# EAGLE board jkff v5 (EAGLE 9.7.0)
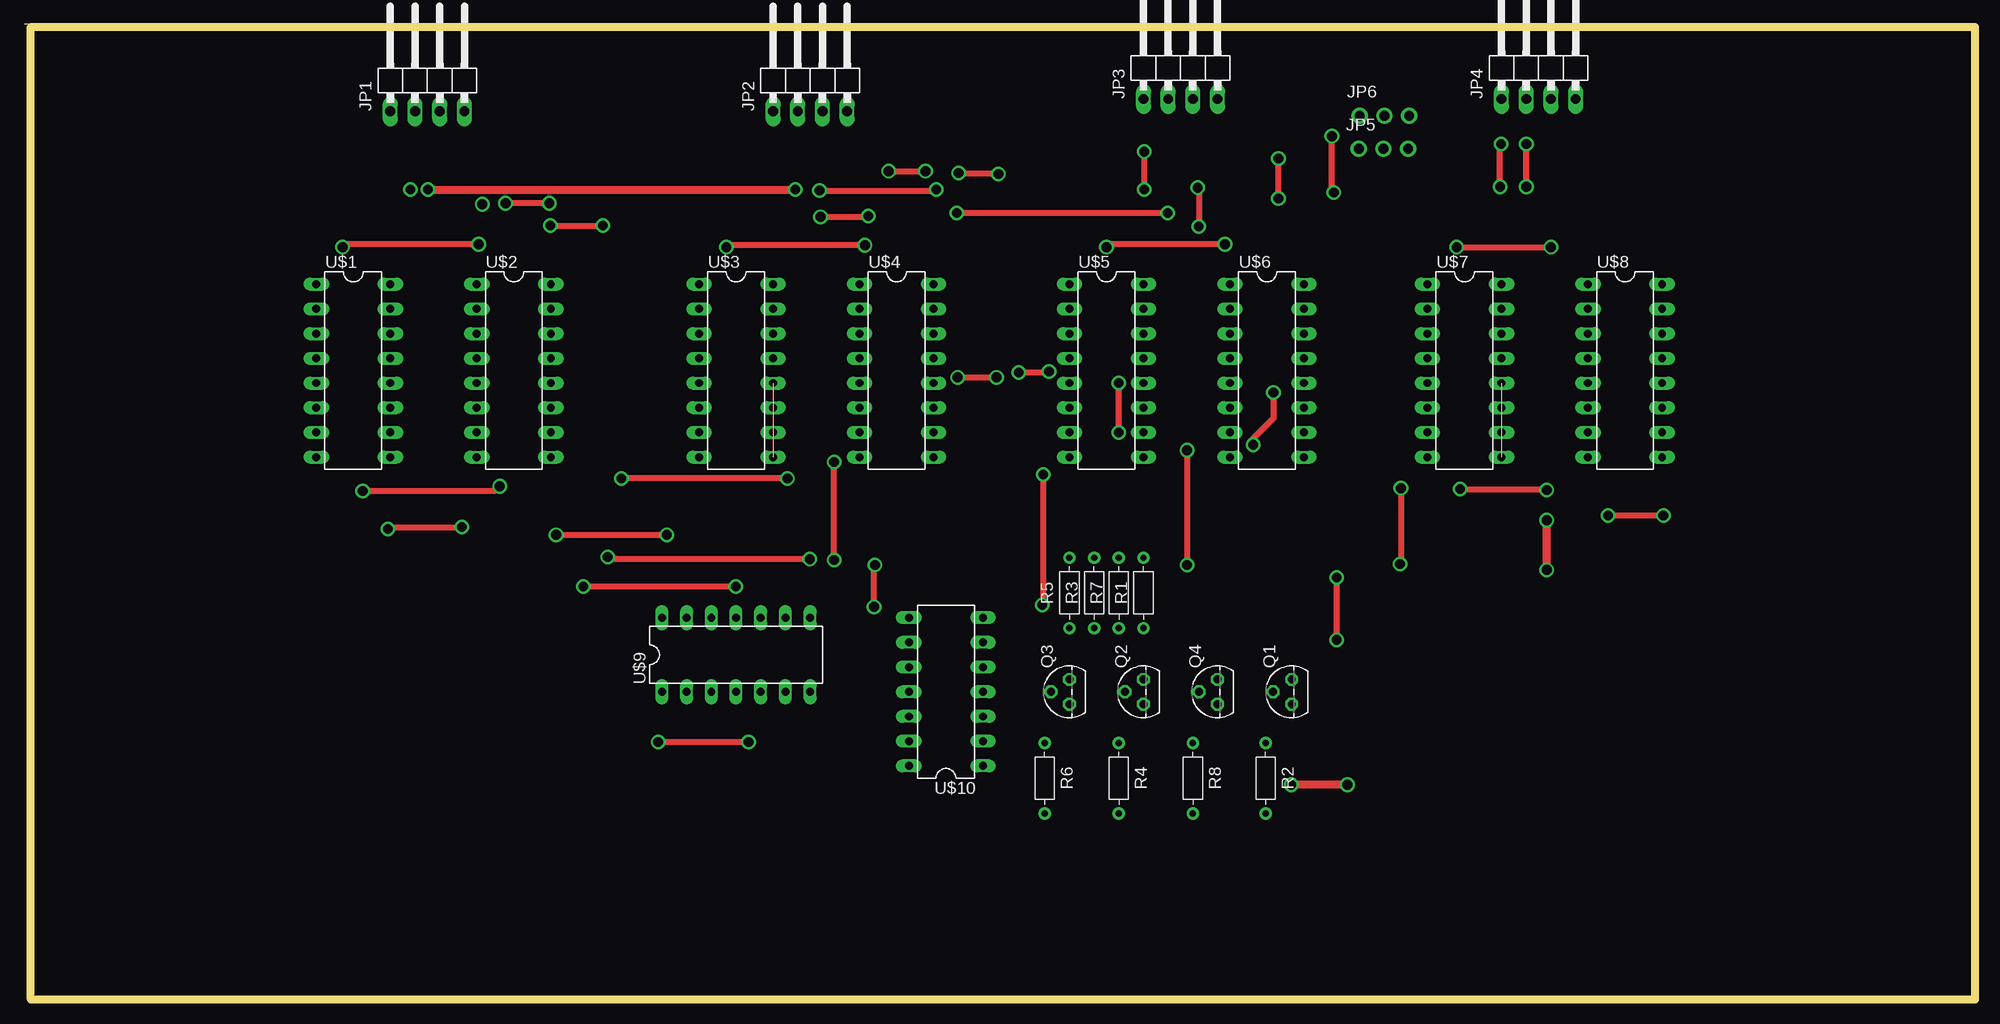
[diagram p0: board, top side]
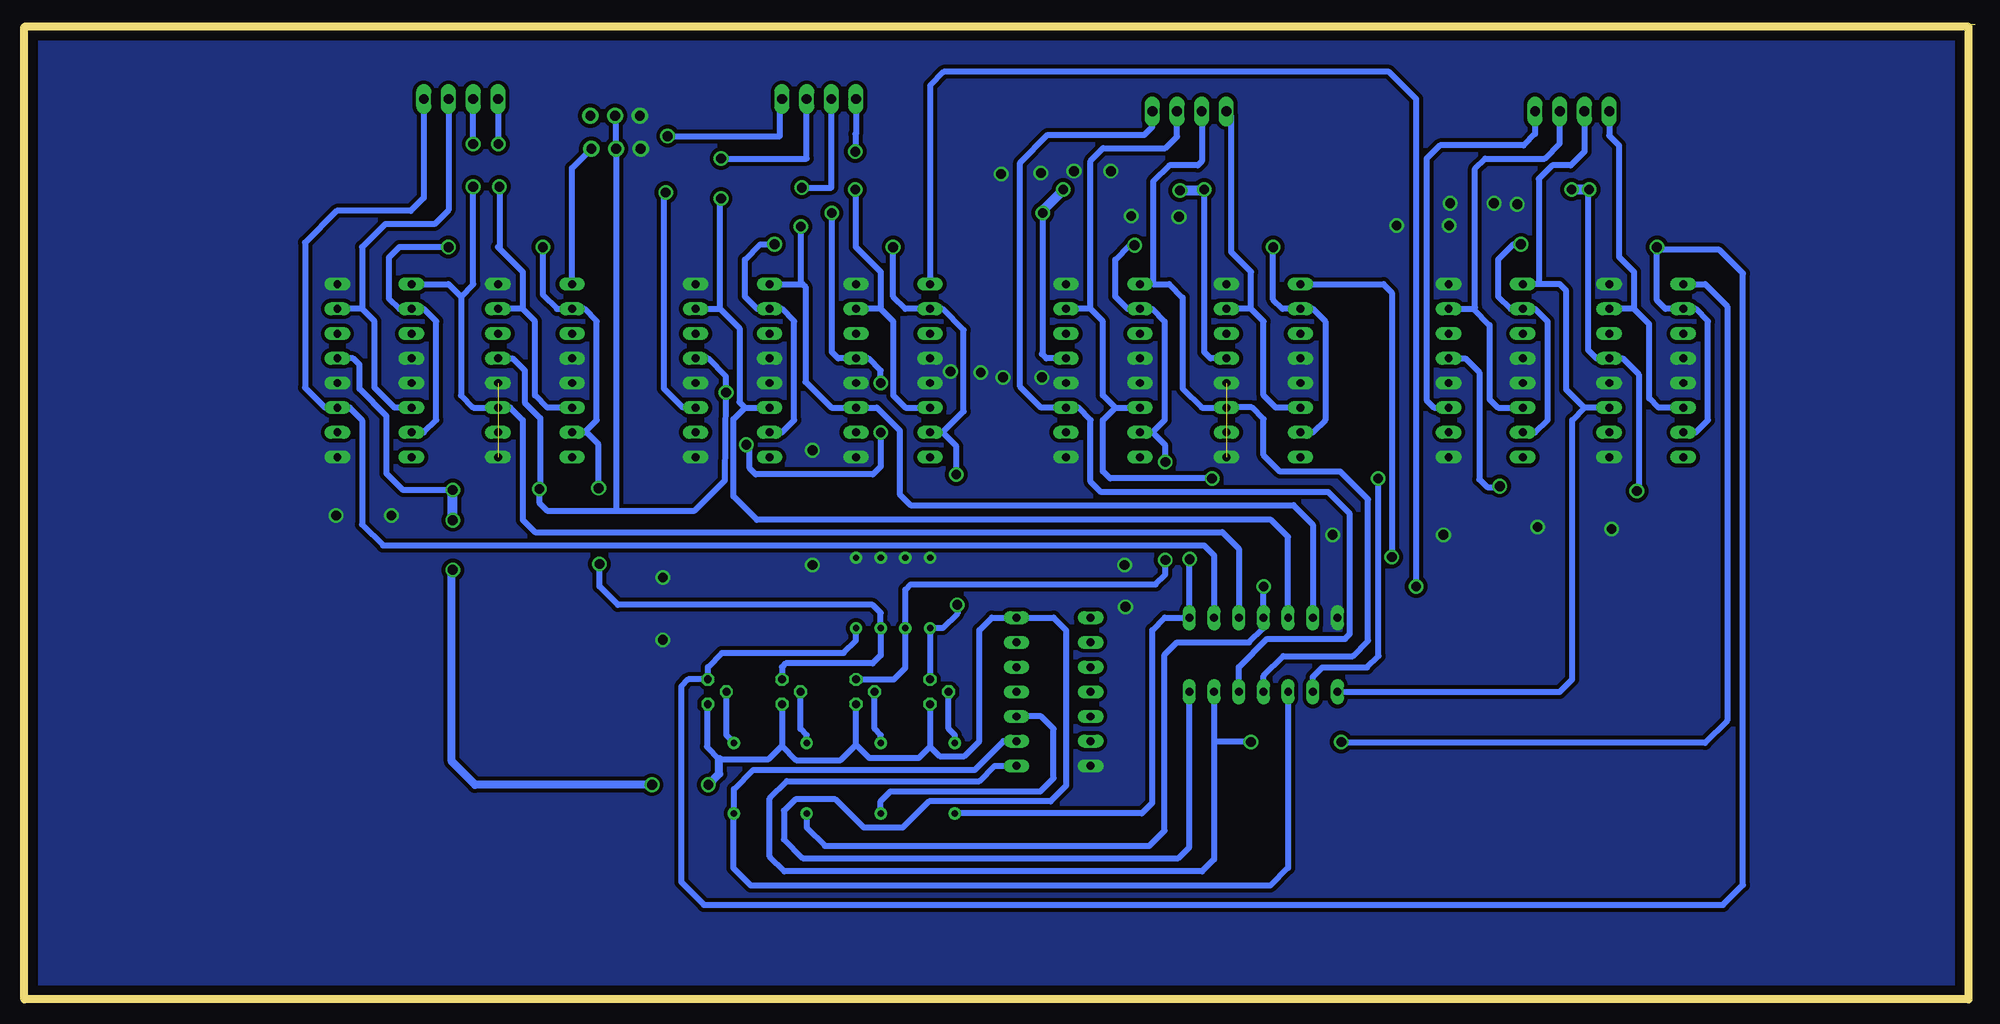
[diagram p1: board, bottom side, seen from below]

Size 200.67 x 100.27 mm. Coordinates in mm from the lower left corner, seen from the top.
Outline: 160,100.27 0,100.27
Outline: 0.67,100 200.67,100 200.67,0 0.67,0 0.67,100
Copper layers (1*16): Top 0.035mm / dielectric 1.5mm / Bottom 0.035mm
Design rules "default": minimum track width 6mil, minimum drill 0.35mm, track to track 6mil, track to pad 6mil, pad to pad 6mil, via to via 6mil, smd to smd 6mil, copper to edge 40mil, drill to drill 6mil, minimum pad ring 10mil, minimum via ring 8mil, stop-mask expansion 4mil, vias tented up to drill 0mil, thermal gap 10mil

## Footprints (pad centres in the part's own frame; a part is rotated, then mirrored left to right if it is on the bottom)
1X04/90 = drill 1.016 long: 1 -3.81,-3.81; 2 -1.27,-3.81; 3 1.27,-3.81; 4 3.81,-3.81
1X03-CLEANBIG = drill 1.016 pad 1.676: 1 -2.54,0; 2 0,0; 3 2.54,0
TO92 = drill 0.813 octagon: 1 -1.27,0; 2 0,1.905; 3 1.27,0
RESAD724W46L381D178B = drill 0.66 pad 1.26: 1 -3.62,0; 2 3.62,0
DIO16 = drill 0.813 long: 1 -15.24,-3.81; 2 -12.7,-3.81; 3 -10.16,-3.81; 4 -7.62,-3.81; 5 -5.08,-3.81; 6 -2.54,-3.81; 7 0,-3.81; 8 2.54,-3.81; 9 2.54,3.81; 10 0,3.81; 11 -2.54,3.81; 12 -5.08,3.81; 13 -7.62,3.81; 14 -10.16,3.81; 15 -12.7,3.81; 16 -15.24,3.81
DIO14 = drill 0.813 long: 1 -12.7,-3.81; 2 -10.16,-3.81; 3 -7.62,-3.81; 4 -5.08,-3.81; 5 -2.54,-3.81; 6 0,-3.81; 7 2.54,-3.81; 8 2.54,3.81; 9 0,3.81; 10 -2.54,3.81; 11 -5.08,3.81; 12 -7.62,3.81; 13 -10.16,3.81; 14 -12.7,3.81

## Placement (x,y rotation side)
JP1  PINHD-1X4/90  [1X04/90]  41.46,95.13 0 top
JP2  PINHD-1X4/90  [1X04/90]  80.83,95.13 0 top
JP3  PINHD-1X4/90  [1X04/90]  118.93,96.4 0 top
JP4  PINHD-1X4/90  [1X04/90]  155.76,96.4 0 top
JP5  [1X03-CLEANBIG]  139.8,87.47 0 top
JP6  [1X03-CLEANBIG]  139.9,90.87 0 top
Q1  NPN  [TO92]  130.36,31.63 90 top
Q2  NPN  [TO92]  115.12,31.63 90 top
Q3  NPN  [TO92]  107.5,31.63 90 top
Q4  NPN  [TO92]  122.74,31.63 90 top
R1  [RESAD724W46L381D178B]  115.12,41.79 90 top
R2  [RESAD724W46L381D178B]  127.68,22.74 270 top
R3  [RESAD724W46L381D178B]  110.04,41.79 90 top
R4  [RESAD724W46L381D178B]  112.58,22.74 270 top
R5  [RESAD724W46L381D178B]  107.5,41.79 90 top
R6  [RESAD724W46L381D178B]  104.96,22.74 270 top
R7  [RESAD724W46L381D178B]  112.58,41.79 90 top
R8  [RESAD724W46L381D178B]  120.2,22.74 270 top
U$1  74LS76  [DIO16]  33.84,58.3 270 top
U$2  74LS76  [DIO16]  50.35,58.3 270 top
U$3  74LS76  [DIO16]  73.21,58.3 270 top
U$4  74LS76  [DIO16]  89.72,58.3 270 top
U$5  74LS76  [DIO16]  111.31,58.3 270 top
U$6  74LS76  [DIO16]  127.82,58.3 270 top
U$7  74LS76  [DIO16]  148.14,58.3 270 top
U$8  74LS76  [DIO16]  164.65,58.3 270 top
U$9  74LS08  [DIO14]  78.29,35.44 0 top
U$10  74LS32  [DIO14]  94.8,36.71 90 top

## Library data of the parts
JP1-JP4 = Connector; CATEGORY: CONNECTOR; SUB-CATEGORY: PIN-HEADER
JP5 JP6 = adafruit
Q1-Q4 = Transistor; CATEGORY: Transistor; SUB-CATEGORY: BJT; TYPE: NPN
R1-R8 = Tutorial - Fusion 360; CATEGORY: Resistor; SUB-CATEGORY: Fixed
U$1-U$10 = Library

## Nets
A1: JP1.1 U$1.6 U$1.15
A2: JP2.1 U$3.6 U$3.15
A3: JP3.1 U$5.6 U$5.15
A4: JP4.1 U$7.6 U$7.15
B1: JP1.2 U$1.11 U$2.1 U$9.1
B2: JP2.2 U$3.11 U$4.1 U$9.4
B3: JP3.2 U$5.11 U$6.1 U$9.13
B4: JP4.2 U$7.11 U$8.1 U$9.10
C1: JP1.3 U$2.6 U$2.15
C2: JP2.3 U$4.6 U$4.15 U$9.2
C3: JP3.3 U$6.6 U$6.15 U$9.12
C4: JP4.3 U$8.6 U$8.15
D1: JP1.4 U$2.11
D2: JP2.4 U$4.11 U$9.5
D3: JP3.4 U$6.11
D4: JP4.4 U$8.11 U$9.9
GND: JP5.2 JP6.2 Q1.1 Q2.1 Q3.1 Q4.1 U$1.13 U$2.13 U$3.13 U$4.13 U$5.13 U$6.13 U$7.13 U$8.13 U$9.7 U$10.7
IN: JP5.3 U$7.1
N$1: Q2.2 R4.1
N$7: Q3.2 R6.1
N$8: Q4.2 R8.1
N$16: Q1.2 R2.1
OUT1: R2.2 U$9.3 U$10.2
OUT2: U$1.1 U$9.6 U$10.1
OUT3: R6.2 U$3.1 U$9.8
OUT4: R8.2 U$5.1 U$9.11
OUT32: R4.2 U$10.3
OUT_TO_DIS: JP6.3
RES1: Q1.3 R1.1 U$1.2 U$1.7 U$2.2 U$2.7
RES2: Q2.3 R3.1 U$3.2 U$3.7 U$4.2 U$4.7
RES3: Q3.3 R5.1 U$5.2 U$5.7 U$6.2 U$6.7
RES4: Q4.3 R7.1 U$7.2 U$7.7 U$8.2 U$8.7
VCC: JP5.1 JP6.1 R1.2 R3.2 R5.2 R7.2 U$1.4 U$1.5 U$1.9 U$1.12 U$1.16 U$2.4 U$2.5 U$2.9 U$2.12 U$2.16 U$3.4 U$3.5 U$3.9 U$3.12 U$3.16 U$4.4 U$4.5 U$4.9 U$4.12 U$4.16 U$5.4 U$5.5 U$5.9 U$5.12 U$5.16 U$6.4 U$6.5 U$6.9 U$6.12 U$6.16 U$7.4 U$7.5 U$7.9 U$7.12 U$7.16 U$8.4 U$8.5 U$8.9 U$8.12 U$8.16 U$9.14 U$10.14

## Tracks (layer width: path | path; a pad name or v marks a point on that pad's centre or on a via)
A1
  Bottom 0.61: U$1.6 32.57,60.84 33.54,61.81 33.54,69.43 35.11,71 | 35.11,71 U$1.15 | JP1.1 37.65,88.82 36.65,87.82 36.65,76.35 35.11,74.81 35.11,71
A2
  Bottom 0.61: U$3.6 71.94,60.84 73.21,62.11 73.21,69.73 74.48,71 | 74.48,71 U$3.15 | JP2.1 76.52,90.82 76.52,76.85 74.48,74.81 74.48,71
A3  (via drill 1)
  Top 0.61: v115.2,83.27 v115.2,87.17
  Bottom 0.61: 112.58,71 U$5.15 | 112.58,71 111.31,69.73 111.31,62.11 110.04,60.84 U$5.6 | 112.58,71 112.58,74.81 115.12,77.35 115.12,83.27 v115.2,83.27 | JP3.1 115.12,88.97 | 115.12,88.97 115.2,88.97 | v115.2,87.17 115.12,87.17 115.12,88.97
A4  (via drill 1)
  Top 0.61: v151.8,83.57 151.8,87.97 v151.9,87.97
  Bottom 0.61: U$7.6 146.87,60.84 148.14,62.11 148.14,69.73 149.41,71 | 149.41,71 U$7.15 | 149.41,71 149.41,74.81 151.95,77.35 151.8,77.35 v151.8,83.57 | v151.9,87.97 151.9,92.59 JP4.1
B1
  Bottom 0.61: U$1.11 40.19,60.84 | 40.19,60.84 42.06,62.71 42.06,72.87 42.73,73.54 44.89,73.54 | 44.89,73.54 U$2.1 | 44.89,73.54 44.89,84.38 43.5,85.77 41.6,85.77 40.2,87.17 40.2,88.37 40.19,88.38 JP1.2 | U$9.1 42.73,31.63 41.46,32.9 41.46,59.57 40.19,60.84
B2
  Bottom 0.61: 84.56,73.54 82.9,73.54 81.53,72.17 81.53,62.81 79.56,60.84 U$3.11 76.99,60.87 74.4,60.87 73.2,59.67 73.2,55.97 71.5,54.27 65.3,54.27 62.45,51.42 62.45,36.88 64.02,35.31 71.17,35.31 73.21,33.27 U$9.4 | 84.56,73.54 U$4.1 | JP2.2 79.56,86.18 79.97,85.77 82.9,85.77 84.56,84.11 84.56,73.54
B3  (via drill 1)
  Top 0.61: v120.7,83.47 120.8,83.37 v120.8,79.47
  Bottom 0.61: U$6.1 120.8,73.54 | 120.8,73.54 120.6,73.54 120.33,73.27 120.33,63.51 117.66,60.84 U$5.11 112.98,60.84 110.64,58.5 110.64,51.95 109.52,50.83 70.13,50.83 68.13,48.83 U$9.13 | JP3.2 117.66,83.47 v120.7,83.47 | v120.8,79.47 120.8,73.54
B4  (via drill 1)
  Top 0.61: v154.5,83.57 v154.5,87.97
  Bottom 0.61: U$8.1 157.03,73.54 155.76,72.27 | 155.76,72.27 155.76,62.11 154.49,60.84 U$7.11 150.68,60.84 149.41,59.57 149.41,49.32 148.13,48.04 77.43,48.04 75.75,46.36 U$9.10 | 155.76,72.27 154.49,73.54 v154.49,83.57 v154.5,83.57 | v154.5,87.97 JP4.2
C1
  Bottom 0.61: U$2.15 51.62,71 | 51.62,71 49.95,69.33 49.95,61.71 49.08,60.84 U$2.6 | JP1.3 42.73,88.02 44.28,86.47 50.4,86.47 51.45,85.42 51.45,71.17 51.62,71
C2  (via drill 1)
  Top 0.61: v78.5,53.57 v61.4,53.57
  Bottom 0.61: 88.45,60.84 U$4.6 | 88.45,60.84 89.72,62.11 89.72,69.73 90.99,71 | 90.99,71 U$4.15 | 90.99,71 90.99,86.23 89.69,87.53 83.29,87.53 82.1,88.72 JP2.3 | U$9.2 68.13,33.17 67.16,34.14 62.55,34.14 61.38,35.31 61.38,53.55 v61.4,53.57 | 88.45,60.84 89.72,59.57 89.72,54.3 88.99,53.57 v78.5,53.57
C3  (via drill 1)
  Top 0.61: v129,82.37 v129,86.47
  Bottom 0.61: U$6.15 129.09,71 | 129.09,71 127.12,69.03 127.12,61.41 126.55,60.84 | 126.55,60.84 U$6.6 | U$9.12 70.67,47.56 72.42,49.31 125.32,49.31 127.73,51.72 127.73,59.66 126.55,60.84 | JP3.3 120.2,86.47 v129,86.47 | 129.09,71 129.09,82.28 v129,82.37
C4
  Bottom 0.61: U$8.6 162.58,60.84 164.65,62.91 164.65,69.73 165.92,71 | 165.92,71 U$8.15 | JP4.3 157.03,81.16 158.47,79.72 163.55,79.72 165.92,77.35 165.92,71
D1
  Bottom 0.61: JP1.4 45.27,89 46.44,87.83 55.06,87.83 56.44,86.45 56.44,61.62 55.66,60.84 U$2.11
D2
  Bottom 0.61: JP2.4 84.64,89.72 85.47,88.89 95.4,88.89 98.24,86.05 98.24,63.01 96.07,60.84 U$4.11 92.26,60.84 90.99,59.57 90.99,53.22 89.92,52.15 66.54,52.15 64.32,49.93 64.32,37.58 64.83,37.07 72.85,37.07 75.75,34.17 U$9.5
D3  (via drill 1)
  Top 0.61: v134.7,82.97 134.5,83.17 v134.5,88.77
  Bottom 0.61: JP3.4 122.94,92.39 122.94,88.77 v134.5,88.77 | U$6.11 132.9,60.84 134.87,62.81 134.87,82.8 v134.7,82.97
D4
  Bottom 0.61: JP4.4 159.57,82.43 160.91,81.09 168.53,81.09 171.8,77.82 171.8,62.91 169.73,60.84 U$8.11 167.19,60.84 165.92,59.57 165.92,48.82 163.78,46.68 79.31,46.68 78.29,45.66 U$9.9
GND  (via drill 1)
  Top 0.61: v112.58,58.3 v112.58,63.38 | v147.7,52.47 156.5,52.47 v156.6,52.37 | v48.9,52.77 48.4,52.27 v34.8,52.27 | v81.8,83.17 93.7,83.17 v93.8,83.27 | v128.49,62.41 128.49,59.77 126.39,57.67 v126.39,57.03 | v117.6,80.87 v117.59,80.86 v95.91,80.86 v95.9,80.87
  Top 0.813: v41.5,83.27 v79.3,83.27 | v156.6,44.17 v156.6,49.27 | v136.1,22.07 v130.3,22.07
  Bottom 0.61: U$6.13 130.36,65.92 128.49,64.05 v128.49,62.41 128.49,62.01 128.59,53.38 131.7,50.27 139.9,50.27 | Q3.1 107.5,25.98 | 107.5,25.98 108.67,24.81 113.75,24.81 115.12,26.18 | 115.12,26.18 Q2.1 | Q4.1 122.74,26.08 | 122.74,26.08 121.27,24.61 116.69,24.61 115.12,26.18 | Q1.1 130.46,30.26 130.46,25.98 129.19,24.71 124.11,24.71 122.74,26.08 | v112.58,63.38 112.58,64.65 113.85,65.92 U$5.13 116.95,65.92 117.6,66.57 v117.6,80.87 | v112.58,58.3 112.58,54.79 113.39,53.98 125.43,53.98 126.05,54.6 126.05,57.03 v126.39,57.03 | 107.5,25.98 106.53,25.01 103.96,25.01 102.42,26.55 102.42,37.98 101.15,39.25 U$10.7 94.8,39.25 93.5,37.95 93.5,21.97 95.1,20.37 107.6,20.37 110.31,17.66 114.32,17.66 117.24,20.58 121.36,20.58 122.54,19.4 122.54,16.46 120.6,14.52 81.97,14.52 80.83,15.66 U$9.7 | U$7.13 150.45,65.92 149.2,64.67 149.2,61.37 147.6,59.77 147.6,52.57 v147.7,52.47 147.7,51.07 146.9,50.27 139.9,50.27 | v156.6,52.37 161.7,52.37 163.4,54.07 163.4,59.97 166.2,62.77 166.2,65.27 166.85,65.92 U$8.13 | v39.7,83.27 39.8,83.27 39.8,66.77 38.95,65.92 U$1.13 36.25,65.92 34.6,64.27 34.6,52.47 v34.8,52.27 | U$2.13 52.45,65.92 51,64.47 51,53.47 50.2,52.67 49,52.67 v48.9,52.77 | U$3.13 78.65,65.92 79.3,66.57 v79.3,83.27 | U$4.13 95.55,65.92 95.95,66.32 | 96,66.37 95.95,66.32 | v95.9,80.87 95.95,80.82 95.95,66.32 | 139.9,50.27 139.8,50.37 JP5.2 139.8,90.77 JP6.2
  Bottom 0.813: v130.3,22.07 129.19,23.18 129.19,24.71 | v136.1,22.07 154.3,22.07 156.7,24.47 156.7,44.07 v156.6,44.17
  Bottom 1.016: v39.7,83.27 v41.5,83.27 | v79.3,83.27 79.4,83.17 v81.8,83.17 | v93.8,83.27 95.9,81.17 v95.9,80.87 | v156.6,49.27 v156.6,52.37
IN
  Bottom 0.61: U$7.1 144.33,85.48 JP5.3
N$1
  Bottom 0.61: R4.1 112.58,27.18 113.22,27.82 Q2.2
N$7
  Bottom 0.61: R6.1 104.96,27.18 105.59,27.82 Q3.2
N$8
  Bottom 0.61: R8.1 120.2,27.18 120.83,27.82 Q4.2
N$16
  Bottom 0.61: R2.1 127.68,26.41 128.46,27.18 Q1.2
OUT1
  Bottom 0.61: U$9.3 70.67,13.52 72.49,11.7 125.93,11.7 127.72,13.49 127.72,19.08 R2.2 127.68,21.61 125.69,23.6 102.9,23.6 99.95,26.55 U$10.2
OUT2  (via drill 1)
  Top 0.61: v65.2,26.47 v74.5,26.47
  Bottom 0.61: U$9.6 78.29,26.57 | 78.29,26.57 78.29,14.39 79.52,13.16 122.48,13.16 124.01,14.69 124.01,20.66 122.23,22.44 102.42,22.44 100.85,24.01 U$10.1 | U$1.1 27.77,73.54 25.5,71.27 25.5,28.67 27.8,26.37 65.1,26.37 v65.2,26.47 | v74.5,26.47 78.19,26.47 78.29,26.57
OUT3  (via drill 1)
  Top 0.61: v80.8,45.27 60.01,45.27 v60.01,45.48
  Bottom 0.61: R6.2 85.72,19.12 84.64,20.2 84.64,37.98 83.37,39.25 U$9.8 80.8,39.28 v80.8,45.27 | U$3.1 60.87,73.54 60.01,72.68 v60.01,45.48
OUT4  (via drill 1)
  Top 0.61: v57.5,42.47 v73.2,42.47
  Bottom 0.61: R8.2 120.2,17.66 118.33,15.79 84.94,15.79 83.37,17.36 83.37,35.44 82.1,36.71 74.68,36.71 73.21,38.18 U$9.11 v73.21,42.46 v73.2,42.47 | U$5.1 107.5,93.97 106.1,95.37 60.3,95.37 57.5,92.57 v57.5,42.47
OUT32
  Bottom 0.61: U$10.3 96.07,29.09 94.8,27.82 94.8,22.74 96.16,21.38 111.59,21.38 112.58,20.39 R4.2
RES1  (via drill 1)
  Top 0.61: v46.73,77.65 33.04,77.65 v32.74,77.35
  Bottom 0.61: U$2.7 45.27,58.3 44,59.57 44,69.73 45.27,71 U$2.2 47.81,71 49.08,72.27 49.08,76.08 47.51,77.65 v46.73,77.65 | U$1.7 28.76,58.3 27.49,59.57 27.49,69.73 28.76,71 U$1.2 31.87,71 32.74,71.87 32.74,77.07 | R1.1 115.12,36.9 116.39,35.63 128.9,35.63 130.36,34.17 Q1.3 132.37,32.9 133.1,32.17 133.1,12.07 130.76,9.73 25.94,9.73 23.9,11.77 23.9,74.67 26.3,77.07 32.74,77.07 | 32.74,77.07 v32.74,77.35
RES2  (via drill 1)
  Top 0.61: v72.21,77.35 72.41,77.55 v86.47,77.55 | v83.3,45.17 v83.3,55.27
  Bottom 0.61: 84.64,58.3 83.37,59.57 83.37,69.73 84.64,71 U$4.2 87.18,71 88.45,72.27 88.45,76.08 86.98,77.55 v86.47,77.55 | 84.64,58.3 U$4.7 | U$3.7 68.13,58.3 66.86,59.57 66.86,69.73 68.13,71 U$3.2 71.24,71 72.21,71.97 v72.21,77.35 | Q2.3 111.23,32.9 110.04,34.09 R3.1 110.04,42.13 109.5,42.67 84.3,42.67 83.3,43.67 v83.3,45.17 | v83.3,55.27 83.3,56.97 84.64,58.3
RES3  (via drill 1)
  Top 0.61: v123.5,77.65 111.61,77.65 v111.31,77.35 | v104.8,53.97 104.8,40.67 v104.7,40.57
  Bottom 0.61: 106.23,58.3 104.06,60.47 104.06,68.83 106.23,71 U$5.2 110.04,71 111.31,72.27 v111.31,77.35 | 106.23,58.3 U$5.7 | U$6.7 122.74,58.3 121.47,59.57 121.47,69.73 122.74,71 U$6.2 125.28,71 126.55,72.27 126.55,76.08 124.98,77.65 v123.5,77.65 | Q3.3 R5.1 106.2,38.17 104.7,39.67 v104.7,40.57 | v104.8,53.97 104.8,56.87 106.23,58.3
RES4  (via drill 1)
  Top 0.61: v147.34,77.35 v157.03,77.35 | v141.6,52.57 141.6,44.87 v141.5,44.77
  Bottom 0.61: U$8.7 159.57,58.3 158.3,59.57 158.3,69.73 159.57,71 U$8.2 162.11,71 163.18,72.07 163.18,76.28 162.11,77.35 v157.03,77.35 | v147.34,77.35 147.34,72.47 145.87,71 U$7.2 143.06,71 141.79,69.73 141.79,59.57 143.06,58.3 U$7.7 142.83,58.3 141.6,57.07 v141.6,52.57 | Q4.3 122.74,34.17 122.37,34.54 113.4,34.54 112.58,35.36 R7.1 112.58,39.75 113.4,40.57 139.6,40.57 141.5,42.47 v141.5,44.77
VCC  (via drill 1)  (2 unrouted)
  Top 0.61: v87.4,40.37 87.4,44.67 v87.5,44.67 | v162.9,49.77 v168.6,49.77 | v135,36.97 v135,43.37 | v54.7,47.77 v66.1,47.77 | v102.3,64.47 105.3,64.47 v105.4,64.57 | v119.6,56.47 v119.6,44.67 | v96,63.97 v100,63.97 | v96.1,84.97 100.1,84.97 v100.2,84.87 | v88.9,85.17 v92.7,85.17 | v81.9,80.47 86.7,80.47 v86.8,80.57 | v54.1,79.57 v59.5,79.57 | v54,81.87 v49.5,81.87 | v37.4,48.37 37.6,48.57 v45,48.57
  other vias: 47.1,81.77
  pour Bottom (isolate 0.406, no thermals): 1,0.27 200.3,0.27 200.3,99.57 1,99.57